# Altium PCB Bicycle_Project.PcbDoc (part 1 of 2)
Units mil, origin at the board's own origin, x right, y up, seen from the top; angles counter-clockwise.
Board outline 2480.32 x 3188.98 mil, 2 copper layers (Top Layer, Bottom Layer), stack 35.085 mil thick; 108 components, 96 nets, 359 pads, 129 vias.
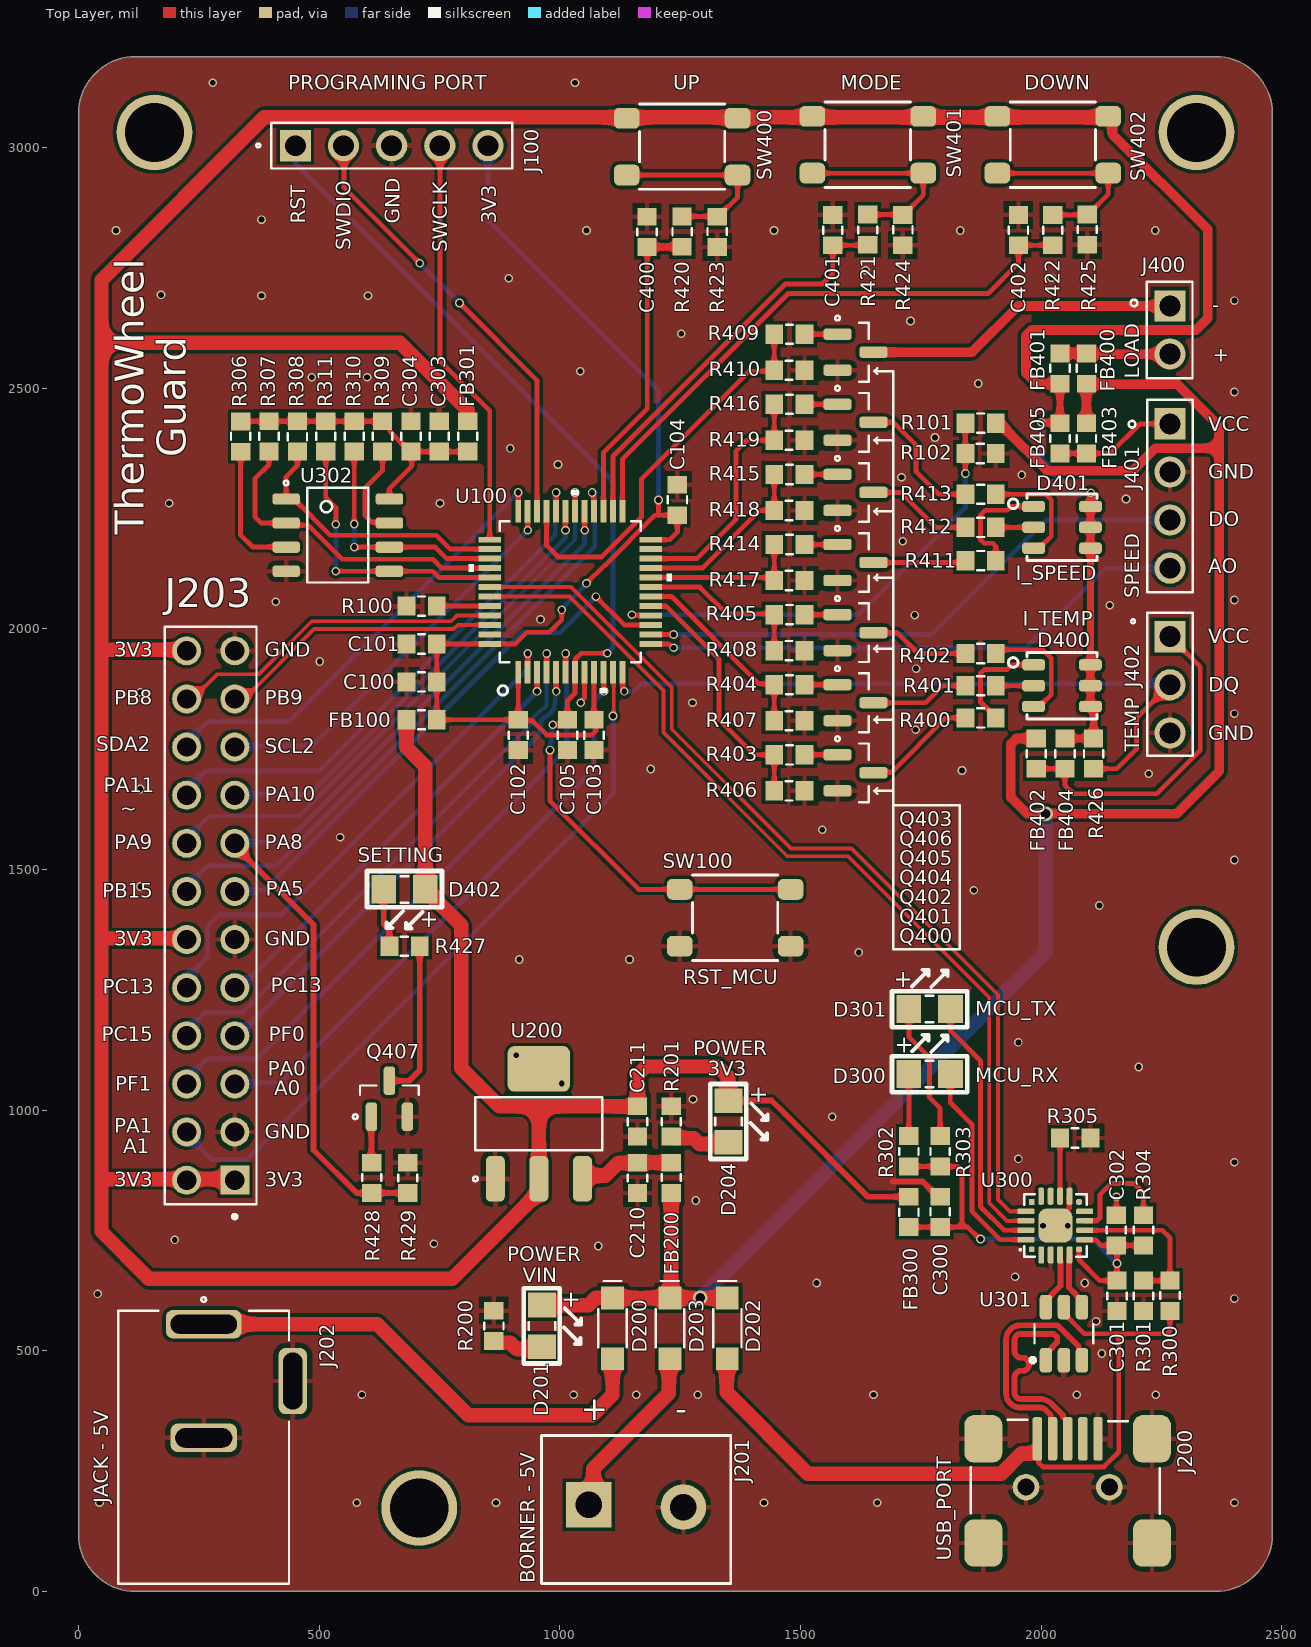
[diagram p0: Top Layer view]
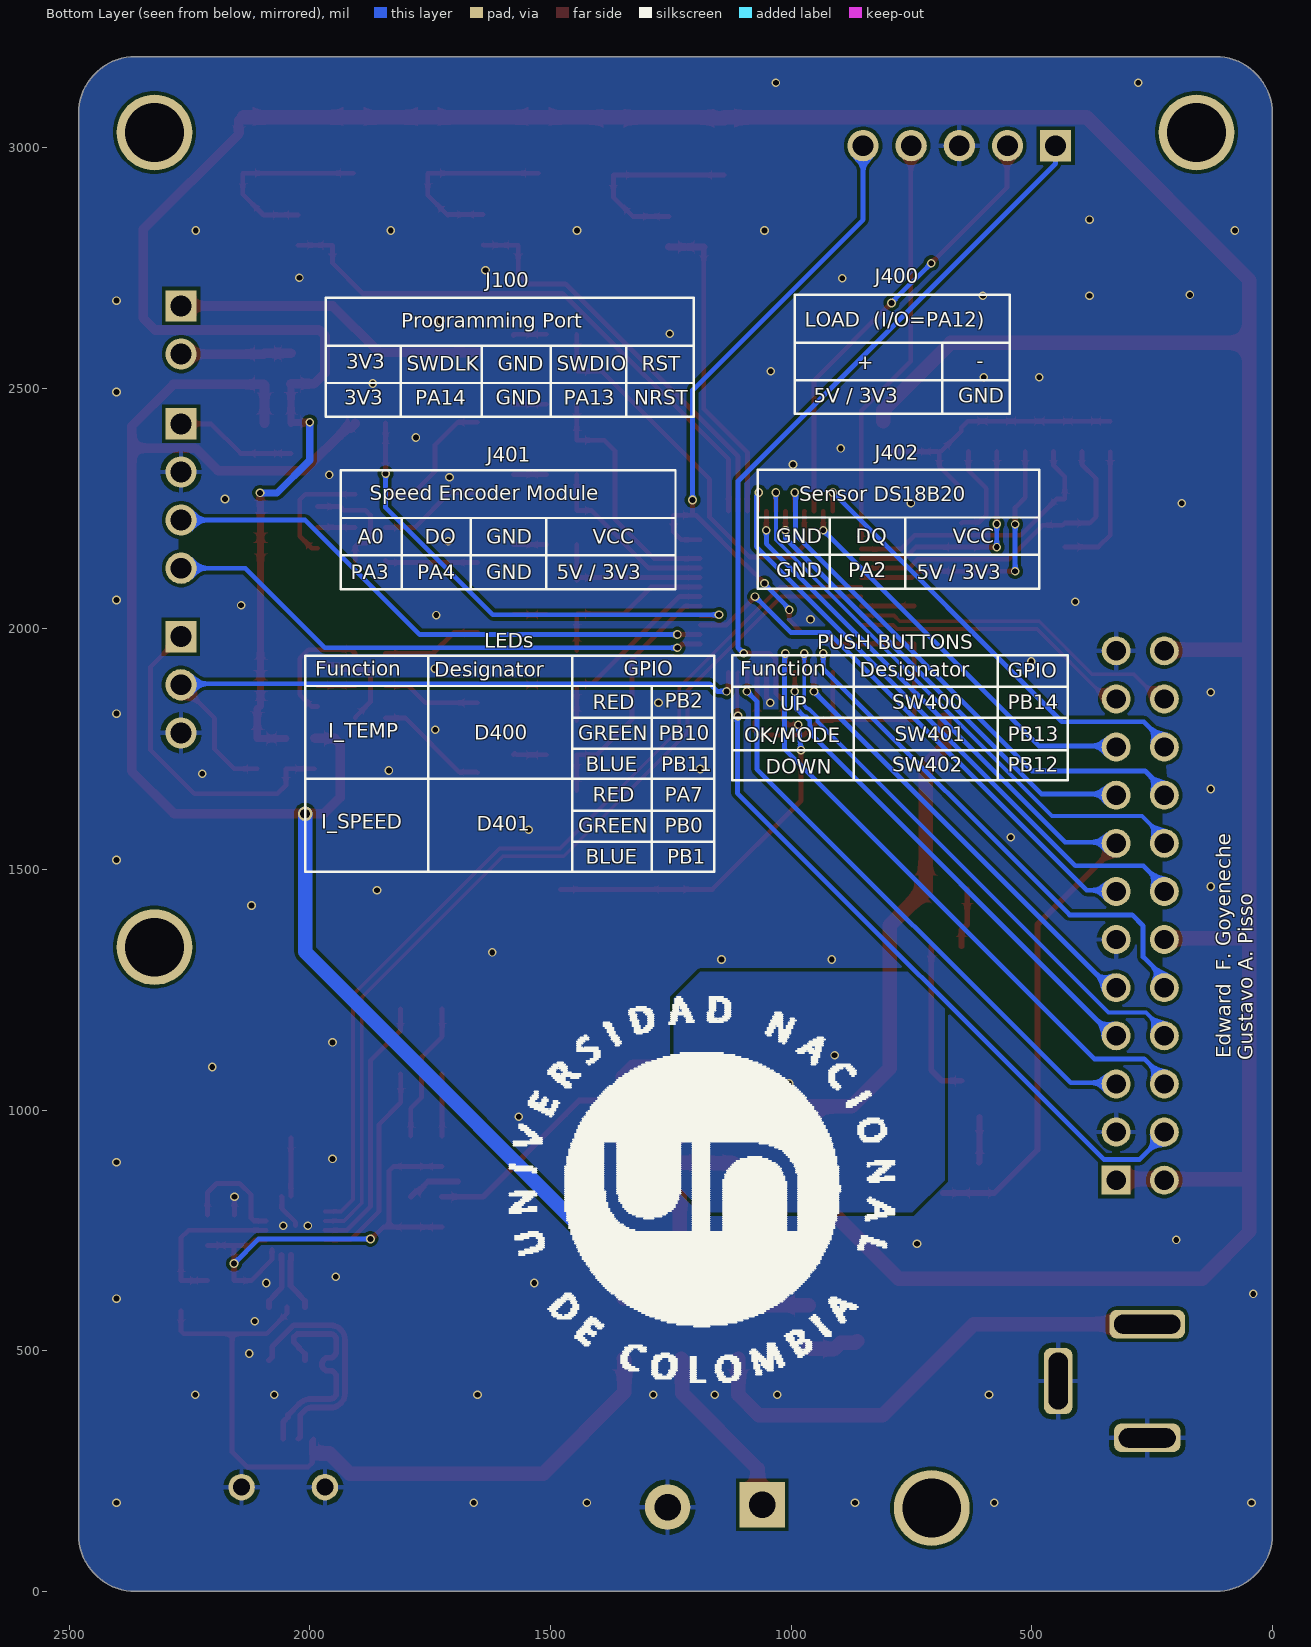
[diagram p1: Bottom Layer view, seen from below]
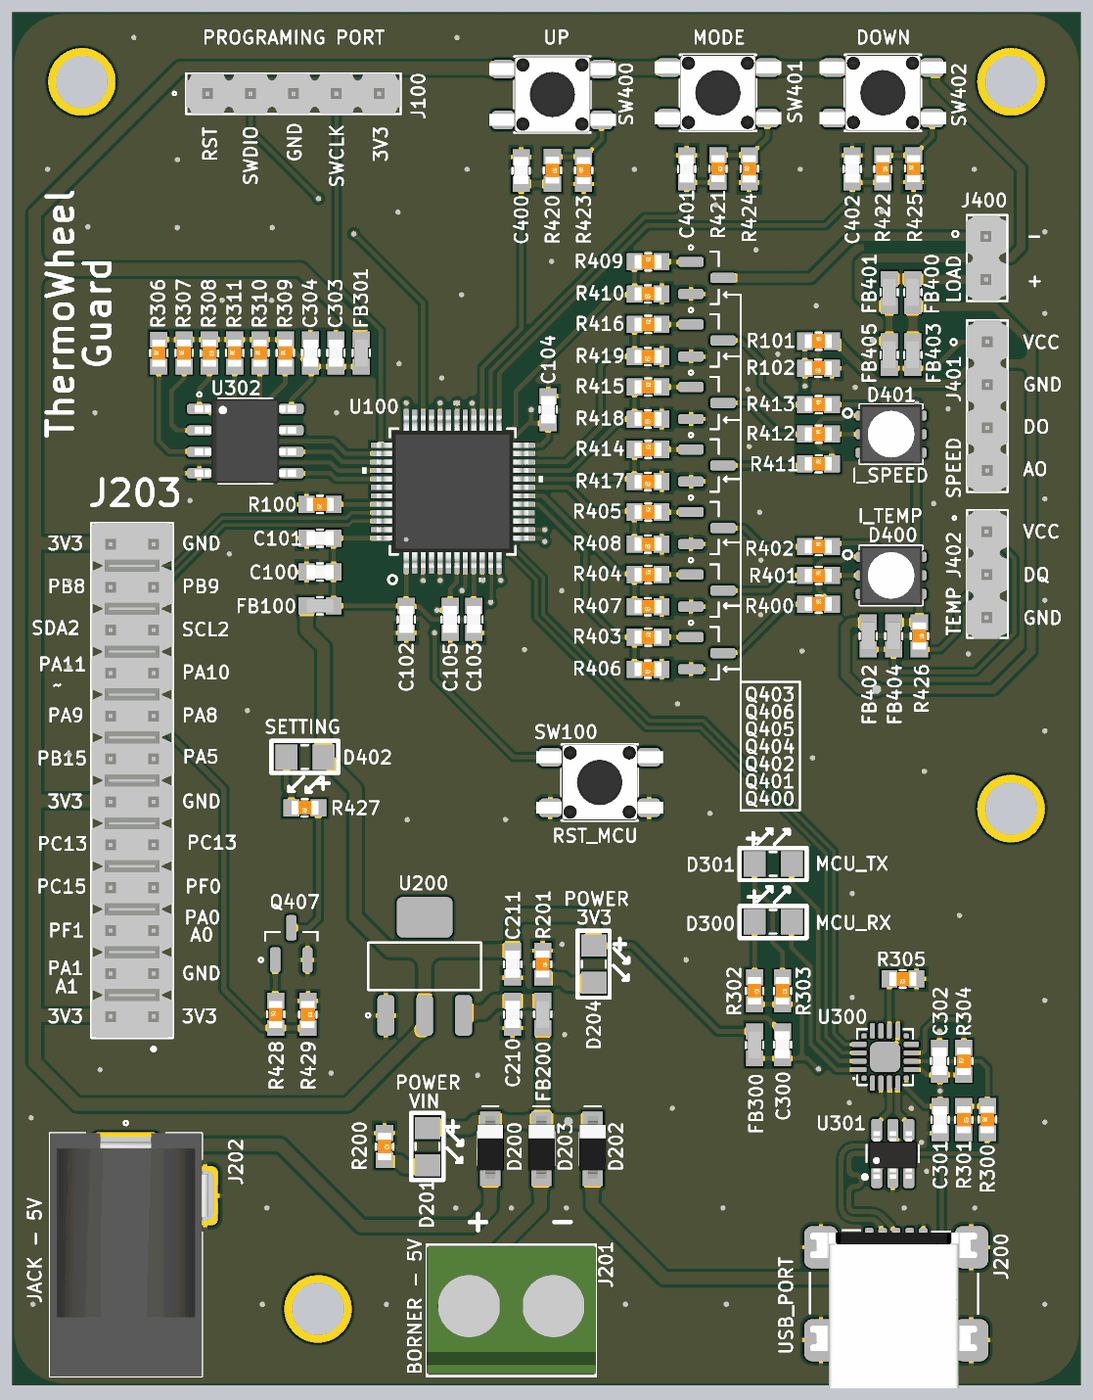
[diagram p3: 3D render of the assembled board from above, using the file's embedded part models]

## Layer stack, top to bottom
Top Solder: solder mask 0.4, Solder Resist, Dk 3.5
Top Layer: signal copper 1.4
Dielectric 1: dielectric 32.285, FR-4, Dk 4.8
Bottom Layer: signal copper 1.4
Bottom Solder: solder mask 0.4, Solder Resist, Dk 3.5

## Board outline
0,118.11 0,3070.87 cw(c118.11,3070.87) 118.11,3188.98 2362.2,3188.98 cw(c2362.2,3070.87) 2480.32,3070.87 2480.32,118.11 cw(c2362.2,118.11) 2362.2,0 118.11,0 cw(c118.11,118.11)

## Design rules (kind name [scope] priority, off if disabled: settings)
Clearance Clearance_D_P [(InNet('D_N') OR InNet('D_P') OR InNet('USB_D_N') OR InNet('USB_D_P'))] p1: gap=6 ignorepadtopadclearanceinfootprint=FALSE
Clearance [All] p2: gap=7 ignorepadtopadclearanceinfootprint=FALSE
DiffPairsRouting [All] p1: maxlimit=6 minlimit=6 mostfreqgap=6 toplayer_minwidth=12 toplayer_maxwidth=12 toplayer_prefwidth=12 bottomlayer_minwidth=12 bottomlayer_maxwidth=12 bottomlayer_prefwidth=12 maxuncoupledlength=500
HoleSize [All] p1: absolutevalues=TRUE maxlimit=1000 minlimit=12 maxpercent=80.000 minpercent=20.000
HoleToHoleClearance [All] p1: gap=12 allowstackedmicrovias=TRUE
MatchedLengths USB_L [InDifferentialPairClass('All Differential Pairs')] p1: tolerance=25 checknetsindiffpair=TRUE checkdiffpairvsdiffpair=FALSE checkxsignals=FALSE checkothers=FALSE
MinimumSolderMaskSliver [All] p1: minsoldermaskwidth=1
NetAntennae [All] p1 off: netantennaetolerance=0
PolygonConnect PolygonConnect_GND [IsVia] p1: connectstyle=Direct reliefconductorwidth=10 reliefentries=4 polygonreliefangle="90 Angle" airgapwidth=10
PolygonConnect [All] p2: connectstyle=Relief reliefconductorwidth=10 reliefentries=4 polygonreliefangle="90 Angle" airgapwidth=10
RoomDefinition Power [InComponentClass('Power')] p1: confinementstyle=ConfineIn formatcopy=TRUE lockcomponents=FALSE outline -1000,-1000 5615,-1000 5615,3730 -1000,3730
RoomDefinition MCU [InComponentClass('MCU')] p2: confinementstyle=ConfineIn formatcopy=TRUE lockcomponents=FALSE outline -1000,-1000 5785,-1000 5785,3635 -1000,3635
RoomDefinition IN_OUT [InComponentClass('IN_OUT')] p3: confinementstyle=ConfineIn formatcopy=TRUE lockcomponents=FALSE outline -1000,-1000 6480,-1000 6480,3255.91 -1000,3255.91
RoomDefinition Communication [InComponentClass('Communication')] p4: confinementstyle=ConfineIn formatcopy=TRUE lockcomponents=FALSE outline -1000,-1000 6120,-1000 6120,3450 -1000,3450
RoutingVias [All] p1: holewidth=12 width=18 viastyle="Through Hole" minholewidth=12 minwidth=18 maxholewidth=44 maxwidth=50
SilkToSilkClearance [All] p1: silktosilkclearance=1
SilkToSolderMaskClearance [IsPad] p1: minsilkscreentomaskgap=0.1 clearancetoexposedcopper=TRUE
SolderMaskExpansion [All] p1: expansion=4 istentingtop=FALSE
Width [All] p1: maxlimit=200 minlimit=8 preferedwidth=10
23 further rules are at their usual default settings.

## Classes and differential pairs
component class Power: C210 C211 D200 D201 D202 D203 D204 FB200 J200 J201 J202 J203 R200 R201 U200
component class MCU: C100 C101 C102 C103 C104 C105 FB100 J100 R100 R101 R102 SW100 U100
component class IN_OUT: C400 C401 C402 D400 D401 D402 FB400 FB401 FB402 FB403 FB404 FB405 J400 J401 J402 Q400 Q401 Q402 Q403 Q404 Q405 Q406 Q407 R400 R401 R402 R403 R404 R405 R406 R407 R408 R409 R410 R411 R412 R413 R414 R415 R416 R417 R418 R419 R420 R421 R422 R423 R424 R425 R426 R427 R428 R429 SW400 SW401 SW402
component class Communication: C300 C301 C302 C303 C304 D300 D301 FB300 FB301 R300 R301 R302 R303 R304 R305 R306 R307 R308 R309 R310 R311 U300 U301 U302
differential pair D: +D_P -D_N
differential pair USB_D: +USB_D_P -USB_D_N

## Components (designator, comment, footprint, x,y, rotation, side; value= is the part's Value field where it differs from the comment)
C100 "22uF 6V3" 0603_cap 712.6,1889.76 r180 top value=22uF
C101 "0.1uF 50V" 0603_cap 712.6,1968.5 r180 top value=0.1uF
C102 "0.1uF 50V" 0603_cap 913.39,1779.52 r270 top value=0.1uF
C103 "0.1uF 50V" 0603_cap 1070.87,1779.52 r270 top value=0.1uF
C104 "0.1uF 50V" 0603_cap 1244.09,2267.72 r90 top value=0.1uF
C105 "10uF 10V" 0603_cap 1015.75,1779.52 r270 top value=10uF
C210 "10uF 10V" 0603_cap 1161.3,859.25 r270 top value=10uF (schematic designator C200)
C211 "22uF 6V3" 0603_cap 1161.3,976.38 r270 top value=22uF (schematic designator C201)
C300 "10uF 10V" 0603_cap 1790.08,788.38 r90 top value=10uF
C301 "0.1uF 50V" 0603_cap 2157.48,614.17 r270 top value=0.1uF
C302 "0.1uF 50V" 0603_cap 2156.2,750.16 r90 top value=0.1uF
C303 "10uF 10V" 0603_cap 749.45,2399.8 r90 top value=10uF
C304 "0.1uF 50V" 0603_cap 690.47,2399.8 r90 top value=0.1uF
C400 "1uF 50V" 0603_cap 1181.1,2824.8 r270 top value=1uF
C401 "1uF 50V" 0603_cap 1566.93,2828.74 r270 top value=1uF
C402 "1uF 50V" 0603_cap 1952.76,2828.74 r270 top value=1uF
D200 "40V 1A" SOD_123 1109.31,546.5 r270 top
D201 "2V" 0805_LED 962.8,551.65 r270 top
D202 "40V 1A" SOD_123 1347.8,546.5 r270 top
D203 "40V 1A" SOD_123 1228.55,546.5 r270 top
D204 "2V" 0805_LED 1350.39,976.38 r270 top
D300 "2V" 0805_LED 1768.39,1075 r0 top
D301 "2.9V" 0805_LED 1768.39,1210 r0 top
D400 "SPEED" RGB_NS_3.5X3.7 2043.31,1881.89 r0 top
D401 "TEMPERATURE" RGB_NS_3.5X3.7 2043.31,2210.91 r0 top
D402 "2V" 0805_LED 677.17,1458.66 r180 top
FB100 "60OHM 2A" 0603_fb 712.6,1811.02 r180 top value="60 OHM"
FB200 "60OHM 2A" 0603_fb 1231.3,859.25 r90 top value="60 OHM"
FB300 "60OHM 2A" 0603_fb 1725.08,788.38 r270 top value="60 OHM"
FB301 "60OHM 2A" 0603_fb 808.42,2399.8 r90 top value="60 OHM"
FB400 "60OHM 2A" 0603_fb 2094.02,2540.91 r90 top value="60 OHM"
FB401 "60OHM 2A" 0603_fb 2039.02,2540.91 r90 top value="60 OHM"
FB402 "60OHM 2A" 0603_fb 1989.96,1740.91 r270 top value="60 OHM"
FB403 "60OHM 2A" 0603_fb 2094.02,2395.91 r270 top value="60 OHM"
FB404 "60OHM 2A" 0603_fb 2049.49,1740.91 r270 top value="60 OHM"
FB405 "60OHM 2A" 0603_fb 2039.02,2395.91 r270 top value="60 OHM"
J100 "JTAG" CON_5X1_TH_2.54MM 650.39,3003.94 r0 top
J200 "USB Mini B" CON_5x1_SMD_miniUSB_B 2055.12,208.66 r0 top
J201 "VIN_5V" CON_2x1_TH_5MM 1158.21,170 r0 top
J202 "PWR JACK 2.1mm" CON_POWER_BARREL_2.1MM_3CONN 259.84,437.01 r0 top
J203 "10129381-924001BLF" CON_2x12_th_2.54MM 324.41,854.33 r90 top
J400 "LOAD" CON_2X1_TH_2.54MM 2267,2621 r270 top
J401 "SPEED" CON_4X1_TH_2.54MM 2267.59,2276 r270 top
J402 "TEMP" CON_3X1_TH_2.54MM 2267.72,1883.77 r270 top
Q400 "N CH" SOT_23_3 1614.17,1700.79 r0 top
Q401 "N CH" SOT_23_3 1614.17,1846.46 r0 top
Q402 "N CH" SOT_23_3 1614.17,1992.13 r0 top
Q403 "N CH" SOT_23_3 1614.17,2574.8 r0 top
Q404 "N CH" SOT_23_3 1614.17,2137.8 r0 top
Q405 "N CH" SOT_23_3 1614.17,2283.46 r0 top
Q406 "N CH" SOT_23_3 1614.17,2429.13 r0 top
Q407 "N CH" SOT_23_3 645.67,1023.62 r90 top
R100 "10k 1/10W" 0603_res 712.6,2047.24 r180 top value=10k
R101 "5k1 1/10W" 0603_res 1874.02,2427.41 r0 top value=5k1
R102 "10k 1/10W" 0603_res 1874.02,2364.41 r180 top value=10k
R200 "220R 1/10W" 0603_res 862.8,551.65 r270 top value=220R
R201 "100R 1/10W" 0603_res 1231.3,976.38 r270 top value=100R
R300 "5k1 1/10W" 0603_res 2267.72,614.17 r90 top value=5k1
R301 "10k 1/10W" 0603_res 2212.6,614.17 r270 top value=10k
R302 "100R 1/10W" 0603_res 1725.08,914.38 r270 top value=100R
R303 "33R 1/10W" 0603_res 1790.08,914.38 r270 top value=33R
R304 "10k 1/10W" 0603_res 2212.6,750.16 r90 top value=10k
R305 "3k3 1/10W" 0603_res 2070.87,941.93 r180 top value=3k3
R306 "10k 1/10W" 0603_res 336.61,2399.61 r90 top value=10k
R307 "10k 1/10W" 0603_res 395.59,2399.8 r90 top value=10k
R308 "10k 1/10W" 0603_res 454.57,2399.8 r270 top value=10k
R309 "10k 1/10W" 0603_res 631.5,2399.8 r90 top value=10k
R310 "10k 1/10W" 0603_res 572.52,2399.8 r90 top value=10k
R311 "10k 1/10W" 0603_res 513.54,2399.8 r90 top value=10k
R400 "52R3 1/10W" 0603_res 1874.02,1814.96 r0 top value=52R3
R401 "24R 1/10W" 0603_res 1874.01,1881.89 r0 top value=24R
R402 "30 1/10W" 0603_res 1874.02,1948.82 r0 top value=30R
R403 "1k 1/10W" 0603_res 1476.89,1738.19 r0 top value=1k
R404 "1k 1/10W" 0603_res 1476.89,1883.86 r0 top value=1k
R405 "1k 1/10W" 0603_res 1476.89,2029.53 r0 top value=1k
R406 "10k 1/10W" 0603_res 1476.89,1663.39 r180 top value=10k
R407 "10k 1/10W" 0603_res 1476.89,1809.06 r180 top value=10k
R408 "10k 1/10W" 0603_res 1476.89,1954.72 r180 top value=10k
R409 "1k 1/10W" 0603_res 1476.89,2612.2 r0 top value=1k
R410 "10k 1/10W" 0603_res 1476.89,2537.4 r180 top value=10k
R411 "52R3 1/10W" 0603_res 1874.02,2141.73 r0 top value=52R3
R412 "24R 1/10W" 0603_res 1874.02,2210.91 r0 top value=24R
R413 "30 1/10W" 0603_res 1874.02,2279.53 r0 top value=30R
R414 "1k 1/10W" 0603_res 1476.89,2175.39 r0 top value=1k
R415 "1k 1/10W" 0603_res 1476.89,2320.77 r0 top value=1k
R416 "1k 1/10W" 0603_res 1476.89,2466.54 r0 top value=1k
R417 "10k 1/10W" 0603_res 1476.89,2100.39 r180 top value=10k
R418 "10k 1/10W" 0603_res 1476.89,2245.96 r180 top value=10k
R419 "10k 1/10W" 0603_res 1476.89,2391.73 r180 top value=10k
R420 "1k 1/10W" 0603_res 1253.94,2825.51 r270 top value=1k
R421 "1k 1/10W" 0603_res 1639.76,2829.45 r270 top value=1k
R422 "1k 1/10W" 0603_res 2024.25,2828.74 r270 top value=1k
R423 "10k 1/10W" 0603_res 1326.77,2824.8 r90 top value=10k
R424 "10k 1/10W" 0603_res 1712.6,2828.74 r90 top value=10k
R425 "10k 1/10W" 0603_res 2095.75,2829.45 r90 top value=10k
R426 "4k7 1/10W" 0603_res 2109.02,1740.91 r270 top value=4k7
R427 "100R 1/10W" 0603_res 677.17,1340.55 r180 top value=100R
R428 "1k 1/10W" 0603_res 609.19,859.25 r90 top value=1k
R429 "10k 1/10W" 0603_res 684,859.25 r270 top value=10k
SW100 "RST_MCU" Sw_PUSH_4.5x4.5x5mm 1364.17,1399.61 r0 top
SW400 "UP" Sw_PUSH_4.5x4.5x5mm 1253.94,3001.97 r180 top
SW401 "MODE" Sw_PUSH_4.5x4.5x5mm 1639.76,3005.91 r180 top
SW402 "DOWN" Sw_PUSH_4.5x4.5x5mm 2024.25,3005.91 r180 top
U100 "STM32F030C8T6TR" LQFP48_7x7mm 1021.54,2077.05 r90 top locked
U200 "AMS1117-3.3" SOT_223 956.3,971.38 r90 top
U300 "CP2102N-A02-GQFN20R" WFQFN_20_EP_3X3MM 2029.45,760 r90 top
U301 "USBLC6-2SC6" SOT_23_6 2047.24,535.43 r90 top
U302 "ZD25WQ16BTIGR" SOIC_8_3.9mm 538.43,2194.8 r0 top

## Footprints (in the part's own frame and the unit in brackets; to place one, negate y for a bottom-side part, rotate by r counter-clockwise, add the part's x,y. Pads: shape width x height; smd on the part's side, far side on the other; paste and mask are expansions set on the pad)
0603_cap [mil]
  rect 37x40 smd: 1(-31.5,0) 2(31.5,0)
  silkscreen extent -7,-20 8,20, body extent -31,-17 31,17, height 34
0603_fb [mil]
  rect 37x40 smd: 1(-31.5,0) 2(31.5,0)
  silkscreen extent -7,-20 8,20, body extent -32,-16 31,16, height 32
0603_res [mil] "1608 Metric / 20190225 / C-A.Serna.A"
  rect 37x40 smd: 1(-31.5,0) 2(31.5,0)
  silkscreen extent -7,-20 8,20, body extent -31,-16 32,16, height 12
0805_LED [mm]
  rect 1.3x1.5 smd: 1(-1.1,0) 2(1.1,0)
  silkscreen extent -1.98,-0.97 1.98,2.07, body extent -1,-0.62 1,0.63, height 1.1
CON_2X1_TH_2.54MM [mm]
  rect 1.65x1.65 / inner round 1.65 / far side rect 1.65x1.65 hole 1.1: 1(-1.27,0.015)
  round 1.65 hole 1.1: 2(1.27,0.015)
  silkscreen extent -2.54,-2.06 2.54,1.2, body extent -2.54,-1.27 2.54,1.14, height 8.18
CON_2x1_TH_5MM [mm]
  rect 2.4x2.4 hole 1.4: 1(-2.5,0.254)
  round 2.4 hole 1.4: 2(2.5,0.127)
  silkscreen extent -5,-3.9 5,3.9, body extent -5,-3.75 5,3.75, height 11.5
CON_2x12_th_2.54MM [mm]
  rect 1.53x1.53 hole 1.02: 01(0,0)
  round 1.53 hole 1.02: 02(0,2.54) 03(2.54,0) 04(2.54,2.54) 05(5.08,0) 06(5.08,2.54) 07(7.62,0) 08(7.62,2.54) 09(10.16,0) 10(10.16,2.54) 11(12.7,0) 12(12.7,2.54) 13(15.24,0) 14(15.24,2.54) 15(17.78,0) 16(17.78,2.54) 17(20.32,0) 18(20.32,2.54) 19(22.86,0) 20(22.86,2.54) 21(25.4,0) 22(25.4,2.54) 23(27.94,0) 24(27.94,2.54)
  silkscreen extent -2.02,-1.14 29.21,3.68, body extent -1.27,-1.14 29.21,3.68, height 8.18
CON_3X1_TH_2.54MM [mm]
  rect 1.65x1.65 / inner round 1.65 / far side rect 1.65x1.65 hole 1.1: 1(-2.54,0)
  round 1.65 hole 1.1: 2(0,0) 3(2.54,0)
  silkscreen extent -3.81,-2.05 3.75,1.2, body extent -3.81,-1.25 3.81,1.16, height 8.18
CON_4X1_TH_2.54MM [mm]
  rect 1.65x1.65 / inner round 1.65 / far side rect 1.65x1.65 hole 1.1: 1(-3.81,0)
  round 1.65 hole 1.1: 2(-1.27,0) 3(1.27,0) 4(3.81,0)
  silkscreen extent -5.08,-2.17 5.08,1.2, body extent -5.08,-1.2 5.08,1.2, height 8.18
CON_5x1_SMD_miniUSB_B [mm] "20190328 / V-A.Patino"
  rrect50% 2x2.5 smd: 0(-4.45,-2.75) 0(-4.45,2.75) 0(4.45,-2.75) 0(4.45,2.75)
  round 1.4 hole 0.889: 0(-2.2,0.2) 0(2.2,0.2)
  rrect50% 0.5x2.3 smd: 1(-1.6,2.75) 2(-0.8,2.75) 3(0,2.75) 4(0.8,2.75) 5(1.6,2.75)
  silkscreen extent -5.11,-1.2 4.85,3.76, body extent -5.1,-5.6 4.8,3.65, height 4
CON_5X1_TH_2.54MM [mm]
  rect 1.65x1.65 / inner round 1.65 / far side rect 1.65x1.65 hole 1.1: 1(-5.08,0)
  round 1.65 hole 1.1: 2(-2.54,0) 3(0,0) 4(2.54,0) 5(5.08,0)
  silkscreen extent -7.14,-1.2 6.36,1.2, body extent -6.35,-1.2 6.35,1.2, height 8.18
CON_POWER_BARREL_2.1MM_3CONN [mm]
  rrect50% 4x1.5 hole 1.016 slot 3.5 at 0 deg: 1(0,3)
  rrect50% 3.5x1.5 hole 1.016 slot 3 at 0 deg: 2(0,-3)
  rrect50% 1.5x3.5 hole 1.016 slot 3 at 90 deg: 3(4.7,0)
  silkscreen extent -4.5,-10.7 4.5,4.42, body extent -4.5,-10.7 4.9,3.7, height 11
LQFP48_7x7mm [mil]
  rect 47x12 smd paste+0 mask+1.8: 1(-167.32,108.27) 2(-167.32,88.58) 3(-167.32,68.9) 4(-167.32,49.21) 5(-167.32,29.53) 6(-167.32,9.84) 7(-167.32,-9.84) 8(-167.32,-29.53) 9(-167.32,-49.21) 10(-167.32,-68.9) 11(-167.32,-88.58) 12(-167.32,-108.27) 25(167.32,-108.27) 26(167.32,-88.58) 27(167.32,-68.9) 28(167.32,-49.21) 29(167.32,-29.53) 30(167.32,-9.84) 31(167.32,9.84) 32(167.32,29.53) 33(167.32,49.21) 34(167.32,68.9) 35(167.32,88.58) 36(167.32,108.27)
  rect 12x47 smd paste+0 mask+1.8: 13(-108.27,-167.32) 14(-88.58,-167.32) 15(-68.9,-167.32) 16(-49.21,-167.32) 17(-29.53,-167.32) 18(-9.84,-167.32) 19(9.84,-167.32) 20(29.53,-167.32) 21(49.21,-167.32) 22(68.9,-167.32) 23(88.58,-167.32) 24(108.27,-167.32) 37(108.27,167.32) 38(88.58,167.32) 39(68.9,167.32) 40(49.21,167.32) 41(29.53,167.32) 42(9.84,167.32) 43(-9.84,167.32) 44(-29.53,167.32) 45(-49.21,167.32) 46(-68.9,167.32) 47(-88.58,167.32) 48(-108.27,167.32)
  silkscreen extent -215,-211 211,211, body extent -177,-177 177,177, height 63
RGB_NS_3.5X3.7 [mm] "20220901/V-A.Patino"
  rrect50% 1.2x0.6 smd: 1(-1.5,1.1) 2(-1.5,0) 3(-1.5,-1.1) 4(1.5,-1.1) 5(1.5,0) 6(1.5,1.1)
  silkscreen extent -2.83,-1.75 1.85,1.75, body extent -1.85,-1.75 1.85,1.75, height 2.8
SOD_123 [mm] "/ 20191030 / V-A.Patino"
  rect 1.2x1.2 smd: 1(-1.6,0) 2(1.6,0)
  silkscreen extent -2.5,-0.75 1,0.75, body extent -1.93,-0.8 1.77,0.8, height 1.28
SOIC_8_3.9mm [mm]
  rrect50% 1.45x0.6 smd: 1(-2.725,1.905) 2(-2.725,0.635) 3(-2.725,-0.635) 4(-2.725,-1.905) 5(2.725,-1.905) 6(2.725,-0.635) 7(2.725,0.635) 8(2.725,1.905)
  silkscreen extent -2.85,-2.5 1.6,2.88, body extent -3.01,-2.5 3.01,2.5, height 1.73
SOT_23_3 [mm] "TO-236-3, SC-59/ 20220901 / V-A.Patino"
  rrect50% 1.5x0.6 smd: 1(-0.95,0.95) 2(-0.95,-0.95) 3(0.95,0)
  silkscreen extent -1.07,-1.55 0.7,1.92, body extent -0.7,-1.52 0.7,1.53, height 1.12
SOT_23_6 [mm] "/ 20190225 / V-A.Patino"
  rrect50% 1.3x0.65 smd: 1(-1.4,0.95) 2(-1.4,0) 3(-1.4,-0.95) 4(1.4,-0.95) 5(1.4,0) 6(1.4,0.95)
  silkscreen extent -1.52,-1.55 0.5,1.78, body extent -1.5,-1.45 1.3,1.45, height 1.45
SOT_223 [mm] "TO-261-4, TO-261AA / 20220901/ V-A.Patino"
  rrect50% 2.4x1 smd: 1(-2.9,2.3) 2(-2.9,0) 3(-2.9,-2.3)
  rrect30% 2.4x3.3 smd: 4(2.9,0)
  silkscreen extent -3.02,-3.35 1.4,3.47, body extent -1.86,-3.35 1.86,3.35, height 1.8
Sw_PUSH_4.5x4.5x5mm [mm]
  rrect50% 1.35x1.1 smd: 1(-2.925,1.5) 1(2.925,1.5) 2(-2.925,-1.5) 2(2.925,-1.5)
  silkscreen extent -2.25,-2.25 2.25,2.25, body extent -3.75,-2.25 3.75,2.25, height 3.8
WFQFN_20_EP_3X3MM [mm] "QFN_20/ 20210809/ V-A.Patino"
  rrect50% 0.3x0.3 smd: 1(-1.25,1.25) 6(-1.25,-1.25) 11(1.25,-1.25)
  rrect50% 0.9x0.3 smd: 2(-1.55,0.75) 3(-1.55,0.25) 4(-1.55,-0.25) 5(-1.55,-0.75) 12(1.55,-0.75) 13(1.55,-0.25) 14(1.55,0.25) 15(1.55,0.75)
  rrect50% 0.3x0.9 smd: 7(-0.75,-1.55) 8(-0.25,-1.55) 9(0.25,-1.55) 10(0.75,-1.55) 17(0.75,1.55) 18(0.25,1.55) 19(-0.25,1.55) 20(-0.75,1.55)
  rect 0.3x0.3 smd: 16(1.25,1.25)
  rrect50% 1.8x1.8 smd: 21(0,0)
  silkscreen extent -1.65,-1.65 1.65,1.9, body extent -1.5,-1.5 1.5,1.5, height 0.8

## Part data
C100 C211: library part Cap_22uF_0805_6V3, "6.3V 22uF X5R ±20% 0805 Multilayer Ceramic Capacitors MLCC - SMD/SMT ROHS", Manufacturer="Samsung Electro-Mechanics", Manufacturer Part Number=CL21A226MQQNNNE, Supplier Part Number 1=C5674, ComponentLink1Description=LCSC, ComponentLink1URL=https://www.lcsc.com/product-detail/Multilayer-Ceramic-Capacitors-MLCC-SMD-SMT_Samsung-Electro-Mechanics-CL21A226MQQNNNE_C5674.html, Supplier 1=LCSC
C101 C102 C103 C104 C301 C302 C304: library part Cap_0.1uF_0603_50V, "50V 100nF Y5V -20%~+80% 0603 Multilayer Ceramic Capacitors MLCC - SMD/SMT ROHS", Manufacturer="Walsin Tech Corp", Manufacturer Part Number=0603F104Z500CT, Supplier Part Number 1=C83060, ComponentLink1Description=LCSC, ComponentLink1URL=https://www.lcsc.com/product-detail/Multilayer-Ceramic-Capacitors-MLCC-SMD-SMT_Walsin-Tech-Corp-0603F104Z500CT_C83060.html, Supplier 1=LCSC
C105 C210 C300 C303: library part Cap_10uF_0603_10V, "10V 10uF X5R ±10% 0603 Multilayer Ceramic Capacitors MLCC - SMD/SMT ROHS", Manufacturer=CCTC, Manufacturer Part Number=TCC0603X5R106K100CT, Supplier Part Number 1=C380314, ComponentLink1Description=LCSC, ComponentLink1URL=https://www.lcsc.com/product-detail/Multilayer-Ceramic-Capacitors-MLCC-SMD-SMT_CCTC-TCC0603X5R106K100CT_C380314.html, Supplier 1=LCSC
C400 C401 C402: library part Cap_1uF_0603_50V, "50V 1uF X5R ±10% 0603 Multilayer Ceramic Capacitors MLCC - SMD/SMT ROHS", Manufacturer="Samsung Electro-Mechanics", Manufacturer Part Number=CL10A105KB8NNNC, Supplier Part Number 1=C15849, ComponentLink1Description=LCSC, ComponentLink1URL=https://www.lcsc.com/product-detail/Multilayer-Ceramic-Capacitors-MLCC-SMD-SMT_Samsung-Electro-Mechanics-CL10A105KB8NNNC_C15849.html, Supplier 1=LCSC
D200 D202 D203: library part D_Schottky_40V_1A_SOD_123F, "DIODE SCHOTTKY 40V 1A SOD123F", Manufacturer="Shanghai Prisemi Elec", Manufacturer Part Number=PSBD1DF40V1H, Supplier Part Number 1=C110730, ComponentLink1Description=LCSC, ComponentLink1URL=https://www.lcsc.com/product-detail/Switching-Diode_Shanghai-Prisemi-Elec-PSBD1DF40V1H_C110730.html, Supplier 1=LCSC
D201 D204 D300 D402: library part LED_0805_RED, "LED RED CLEAR 0805 SMD", Manufacturer=XINGLIGHT, Manufacturer Part Number=XL-2012SURC, Supplier Part Number 1=C965812, ComponentLink1Description=LCSC, ComponentLink1URL=https://www.lcsc.com/product-detail/Light-Emitting-Diodes-LED_XINGLIGHT-XL-2012SURC_C965812.html, Supplier 1=LCSC
D301: library part LED_0805_Green, "LED GREEN CLEAR 0805 SMD", Manufacturer=XINGLIGHT, Manufacturer Part Number=XL-2012UGC, Supplier Part Number 1=C965815, ComponentLink1Description=LCSC, ComponentLink1URL=https://www.lcsc.com/product-detail/Light-Emitting-Diodes-LED_XINGLIGHT-XL-2012UGC_C965815.html, Supplier 1=LCSC
D400 D401: library part LED_RGB_3535_SMD, "-30℃~+85℃ RGB 110° 3535(mm) Light Emitting Diodes (LED) ROHS", Manufacturer="Foshan NationStar Optoelectronics", Manufacturer Part Number=RS-3535MWAM, Supplier Part Number 1=C842778, ComponentLink1Description=LCSC, ComponentLink1URL=https://www.lcsc.com/product-detail/Light-Emitting-Diodes-LED_Foshan-NationStar-Optoelectronics-RS-3535MWAM_C842778.html, Supplier 1=LCSC
FB100 FB200 FB300 FB301 FB400 FB401 FB402 FB403 FB404 FB405: library part FB_60_0603_2A, "2A 1 100mΩ 60Ω@100MHz ±25% 0603 Ferrite Beads ROHS", Manufacturer=TAI-TECH, Manufacturer Part Number=HCB1608KF-600T20, Supplier Part Number 1=C369516, ComponentLink1Description=LCSC, ComponentLink1URL=https://www.lcsc.com/product-detail/Ferrite-Beads_TAI-TECH-HCB1608KF-600T20_C369516.html, Supplier 1=LCSC
  FB400 FB402 FB403: Usage=NM
J100: library part Con_5X1_TH_2.54mm, "CONN HEADER VERT 5POS 2.54MM", Manufacturer="Amphenol ICC (FCI)", Manufacturer Part Number=10129378-905001BLF, Supplier Part Number 1=10129378-905001BLF-ND, ComponentLink1Description=Digi-Key, ComponentLink1URL=https://www.digikey.com/en/products/detail/amphenol-cs-fci/10129378-905001BLF/7915937?s=N4IgTCBcDaIIwAY5gJwGYDsAOAtChArAkgEIAyAYiALoC%2BQA, Supplier 1=Digi-Key
J200: library part Con_Mini_USB_B, "CONN RCPT USB2.0 MINI B SMD R/A", Manufacturer="EDAC Inc.", Manufacturer Part Number=KH-MINI-SMT-5P-Cu, Supplier Part Number 1=C2688795, ComponentLink1Description=LCSC, ComponentLink1URL=https://datasheet.lcsc.com/lcsc/2106070035_Shenzhen-Kinghelm-Elec-KH-MINI-SMT-5P-Cu_C2688795.pdf, Supplier 1=LCSC
J201: library part Con_2x1_TH_5mm, "2POS 5MM", Manufacturer=JILN, Manufacturer Part Number=JL126-50002G01, Supplier Part Number 1=C394556, ComponentLink1Description=Digi-Key, ComponentLink1URL=https://www.lcsc.com/product-detail/Screw-terminal_JILN-JL126-50002G01_C394556.html, Supplier 1=LCSC
J202: library part Con_Power_Jack_2.1mm_3pins, "CONN PWR JACK 2X5.5MM SOLDER", Manufacturer=HCTL, Manufacturer Part Number=HC-DC-005-2.0T, Supplier Part Number 1=C3010533, ComponentLink1Description=LCSC, ComponentLink1URL=https://www.lcsc.com/product-detail/AC-DC-Power-Connectors_HCTL-HC-DC-005-2-0T_C3010533.html, Supplier 1=LCSC
J203: library part Con_2x12_TH_2.54mm, "CONN HEADER VERT 24POS 2.54MM", Manufacturer="Amphenol ICC (FCI)", Supplier Part Number 1=10129381-924001BLF-ND, ComponentLink1Description=Digi-Key, Manufacturer Part Number=10129381-924001BLF, Supplier 1=Digi-Key
J400: library part Con_2x1_TH_2.54mm, "CONN HEADER VERT 2POS 2.54MM", Manufacturer="Amphenol ICC (FCI)", Manufacturer Part Number=10129378-902001BLF, Supplier Part Number 1=10129378-902001BLF-ND, ComponentLink1Description=Digi-Key, ComponentLink1URL=https://www.digikey.com/en/products/detail/amphenol-cs-fci/10129378-902001BLF/7915924?s=N4IgTCBcDaIIwAY5gJwGYDsAOAtChYCSAQgDIBiIAugL5A, Supplier 1=Digi-Key
J401: library part Con_4X1_TH_2.54mm, "CONN HEADER VERT 4POS 2.54MM", Manufacturer="Amphenol ICC (FCI)", Manufacturer Part Number=10129378-904001BLF, Supplier Part Number 1=10129378-904001BLF-ND, ComponentLink1Description=Digi-Key, ComponentLink1URL=https://www.digikey.com/en/products/detail/amphenol-cs-fci/10129378-904001BLF/7915932?s=N4IgTCBcDaIIwAY5gJwGYDsAOAtChALAkgEIAyAYiALoC%2BQA, Supplier 1=Digi-Key
J402: library part Con_3X1_TH_2.54mm, "CONN HEADER VERT 3POS 2.54MM", Manufacturer="Amphenol ICC (FCI)", Manufacturer Part Number=10129378-903001BLF, Supplier Part Number 1=10129378-903001BLF-ND, ComponentLink1Description=Digi-Key, ComponentLink1URL=https://www.digikey.com/en/products/detail/amphenol-cs-fci/10129378-903001BLF/7915928, Supplier 1=Digi-Key
Q400 Q401 Q402 Q403 Q404 Q405 Q406 Q407: library part Q_NFET_20V_3.2A_SOT23, "MOSFET N-CH 20V SOT23", Manufacturer=Doeshare, Manufacturer Part Number=DN2302S, Supplier Part Number 1=C2931750, ComponentLink1Description=LCSC, ComponentLink1URL=https://www.lcsc.com/product-detail/MOSFETs_Doeshare-DN2302S_C2931750.html, Supplier 1=LCSC
R100 R102 R301 R304 R306 R307 R308 R309 R310 R311 R406 R407 R408 R410 R417 R418 R419 R423 R424 R425 R429: library part Res_10k_0603_1/10W, "RES SMD 10k OHM 5% 1/10W 0603", Manufacturer=FOJAN, Manufacturer Part Number=FRC0603J103TS, Supplier Part Number 1=C2930027, ComponentLink1Description=LCSC, ComponentLink1URL=https://www.lcsc.com/product-detail/Chip-Resistor-Surface-Mount_FOJAN-FRC0603J103TS_C2930027.html, Supplier 1=LCSC
R101 R300: library part Res_5k1_0603_1/10W, "RES SMD 5k1 OHM 5% 1/10W 0603", Manufacturer=FOJAN, Manufacturer Part Number="FRC0603J512 TS", Supplier Part Number 1=C2907114, ComponentLink1Description=LCSC, ComponentLink1URL=https://www.lcsc.com/product-detail/Chip-Resistor-Surface-Mount_FOJAN-FRC0603J512-TS_C2907114.html, Supplier 1=LCSC
R200: library part Res_220R_0603_1/10W, "RES SMD 220R OHM 5% 1/10W 0603", Manufacturer=FOJAN, Manufacturer Part Number="FRC0603J221 TS", Supplier Part Number 1=C2907127, ComponentLink1Description=LCSC, ComponentLink1URL=https://www.lcsc.com/product-detail/Chip-Resistor-Surface-Mount_FOJAN-FRC0603J221-TS_C2907127.html, Supplier 1=LCSC
R201 R302 R427: library part Res_100R_0603_1/10W, "RES SMD 100R OHM 5% 1/10W 0603", Manufacturer=FOJAN, Manufacturer Part Number="FRC0603J101 TS", Supplier Part Number 1=C2907089, ComponentLink1Description=LCSC, ComponentLink1URL=https://www.lcsc.com/product-detail/Chip-Resistor-Surface-Mount_FOJAN-FRC0603J101-TS_C2907089.html, Supplier 1=LCSC
R303: library part Res_33R_0603_1/10W, "RES SMD 33R OHM 5% 1/10W 0603", Manufacturer=FOJAN, Manufacturer Part Number="FRC0603J330 TS", Supplier Part Number 1=C2907154, ComponentLink1Description=LCSC, ComponentLink1URL=https://www.lcsc.com/product-detail/Chip-Resistor-Surface-Mount_FOJAN-FRC0603J330-TS_C2907154.html, Supplier 1=LCSC
R305: library part Res_3k3_0603_1/10W, "RES SMD 3k3 OHM 5% 1/10W 0603", Manufacturer=FOJAN, Manufacturer Part Number="FRC0603J332 TS", Supplier Part Number 1=C2907140, ComponentLink1Description=LCSC, ComponentLink1URL=https://www.lcsc.com/product-detail/Chip-Resistor-Surface-Mount_FOJAN-FRC0603J332-TS_C2907140.html, Supplier 1=LCSC, Usage=NM
R400 R411: library part Res_52R3_0603_1/10W_1, "RES SMD 52R3 OHM 1% 1/10W 0603", Manufacturer=FOJAN, Manufacturer Part Number=FRC0603F52R3TS, Supplier Part Number 1=C2998074, ComponentLink1Description=LCSC, ComponentLink1URL=https://www.lcsc.com/product-detail/Chip-Resistor-Surface-Mount_FOJAN-FRC0603F52R3TS_C2998074.html, Supplier 1=LCSC
R401 R412: library part Res_24R_0603_1/10W, "RES SMD 24R OHM 5% 1/10W 0603", Manufacturer=FOJAN, Manufacturer Part Number="FRC0603J240 TS", Supplier Part Number 1=C2907132, ComponentLink1Description=LCSC, ComponentLink1URL=https://www.lcsc.com/product-detail/Chip-Resistor-Surface-Mount_FOJAN-FRC0603J240-TS_C2907132.html, Supplier 1=LCSC
R402 R413: library part Res_30R_0603_1/10W, "RES SMD 30R OHM 1% 1/10W 0603", Manufacturer=FOJAN, Manufacturer Part Number=FRC0603F30R0TS, Supplier Part Number 1=C2907026, ComponentLink1Description=LCSC, ComponentLink1URL=https://www.lcsc.com/product-detail/Chip-Resistor-Surface-Mount_FOJAN-FRC0603F30R0TS_C2907026.html, Supplier 1=LCSC
R403 R404 R405 R409 R414 R415 R416 R420 R421 R422 R428: library part Res_1k_0603_1/10W, "RES SMD 1k OHM 5% 1/10W 0603", Manufacturer=FOJAN, Manufacturer Part Number="FRC0603J102 TS", Supplier Part Number 1=C2907113, ComponentLink1Description=LCSC, ComponentLink1URL=https://www.lcsc.com/product-detail/Chip-Resistor-Surface-Mount_FOJAN-FRC0603J102-TS_C2907113.html, Supplier 1=LCSC
R426: library part Res_4k7_0603_1/10W, "RES SMD 4k7 OHM 5% 1/10W 0603", Manufacturer=FOJAN, Manufacturer Part Number="FRC0603J472 TS", Supplier Part Number 1=C2907166, ComponentLink1Description=LCSC, ComponentLink1URL=https://www.lcsc.com/product-detail/Chip-Resistor-Surface-Mount_FOJAN-FRC0603J472-TS_C2907166.html, Supplier 1=LCSC
SW100 SW400 SW401 SW402: library part Sw_PUSH_4.5x4.5x5.0xmm, "SWITCH TACTILE SPST-NO 0.05A 12V", Manufacturer=BZCN, Manufacturer Part Number=TSC015A05026A, Supplier Part Number 1=C2888509, ComponentLink1Description=LCSC, ComponentLink1URL=https://www.lcsc.com/product-detail/Tactile-Switches_BZCN-TSC015A05026A_C2888509.html, Last modified by=N-A.Potosi, Last modified date=20190222, Supplier 1=LCSC
U100: library part IC_STM32F030C8T6TR_LQFP48_7x7MM, "IC MCU 32BIT 64KB FLASH 48LQFP", Manufacturer=STMicroelectronics, Supplier Part Number 1=C23922, ComponentLink1Description=LCSC, ComponentLink1URL=https://www.lcsc.com/product-detail/ST-Microelectronics_STMicroelectronics-STM32F030C8T6_C23922.html, Manufacturer Part Number=STM32F030C8T6TR, Supplier 1=LCSC
U200: library part LDO_3V3_1A_FIXED, "1A 60dB@(120Hz) Fixed 3.3V Positive 18V SOT-223 Linear Voltage Regulators (LDO) ROHS", Manufacturer="UMW(Youtai Semiconductor Co., Ltd.)", Supplier Part Number 1=C347222, ComponentLink1Description=LCSC, ComponentLink1URL=https://www.lcsc.com/product-detail/_UMW-Youtai-Semiconductor-Co-Ltd-_C347222.html, Manufacturer Part Number=AMS1117-3.3, Supplier 1=LCSC
U300: library part IC_SGL_USB2UART-BRIDGE_20QFN, "IC USB TO UART BRIDGE QFN20", Manufacturer="Silicon Labs", Supplier Part Number 1=C969913, ComponentLink1Description=LCSC, ComponentLink1URL=https://www.lcsc.com/product-detail/USB-ICs_SILICON-LABS-CP2102N-A02-GQFN20R_C969913.html, Manufacturer Part Number=CP2102N-A02-GQFN20R, Supplier 1=LCSC
U301: library part TVS_5.25V_2CH_SOT_23_6, "TVS DIODE 5.25V 17V SOT23-6", Manufacturer=STMicroelectronics, Supplier Part Number 1=C7519, ComponentLink1Description=LCSC, ComponentLink1URL=https://www.lcsc.com/product-detail/ESD-Protection-Devices_STMicroelectronics-USBLC6-2SC6_C7519.html, Manufacturer Part Number=USBLC6-2SC6, Supplier 1=LCSC
U302: library part IC_FLASH_ZD25WQ16BTIGR_8SOP, "IC FLASH 16M SPI 85MHZ 8SOP", Manufacturer=Zetta, Supplier Part Number 1=C2896790, ComponentLink1Description=LCSC, ComponentLink1URL=https://www.lcsc.com/product-detail/NOR-FLASH_Zetta-ZD25WQ16BTIGR_C2896790.html, Manufacturer Part Number=ZD25WQ16BTIGR, Supplier 1=LCSC

## Free pads (board coordinates)
  round 157.48 hole 122.05: 0(157.48,3031.5) 0(707.68,173.23) 0(2322.83,1338.58) 0(2322.83,3031.5)

## Via types
v1: diameter 18, hole 12, Top Layer to Bottom Layer, tented both sides, 127 vias
v2: diameter 30, hole 20, Top Layer to Bottom Layer, tented both sides, 2 vias

## Nets (pads, with @x,y where several pads share a name; then routed paths per layer and width w, separated by ;. In a path a pad name is that pad's centre, name@x,y a point inside that pad or via, vN(x,y) a via of type N, cw(c..) or ccw(c..) an arc to the next point about the centre after c; other vN are vias at no path point)
3V3: C211.1 D204.1 D400.4 D400.5 D400.6 D401.4 D401.5 D401.6 D402.1 FB100.2 FB300.1 FB301.2 FB401.1 FB404.1 FB405.1 J203.01 J203.02 J203.12 J203.24 R426.1 SW400.2 SW401.2 SW402.2 U200.2 | length 10772.2
  Top Layer w12: D204.1@1350.39,1019.68 1439.96,1019.68 1468.5,991.14 1639.77,819.88 FB300.1@1725.08,819.88
  Top Layer w15: v1(2000,2429.13) 2000.57,2428.56 2037.86,2428.56 FB405.1@2039.02,2427.41 FB401.1@2039.02,2509.41 ; FB404.1@2049.49,1772.41 R426.1@2109.02,1772.41 2109.02,1834.27 2104.7,1838.58 D400.4@2102.36,1838.58 D400.5@2102.36,1881.89 D400.6@2102.36,1925.2 D401.4@2102.36,2167.6 D401.5@2102.36,2210.91 D401.6@2102.36,2254.21 2102.85,2254.7 2102.85,2281.99 v1(2103.35,2282.48)
  Top Layer w20: FB401.1@2039.02,2509.41 1990.59,2509.41 1968.5,2531.5 1968.5,2609.28 1980.22,2621 2321.79,2621 2346.46,2645.67 2346.46,2829.72 2147.47,3028.71 2147.47,3056.9 SW402.2@2139.41,3064.96
  Top Layer w30: J203.12@216.54,1356.69 49.05,1356.69 47.47,1358.27 ; J203.24@216.54,1956.69 51.41,1956.69 47.47,1952.76 ; J203.01@316.54,856.69 216.54,856.69 49.83,856.69 47.47,854.33 ; FB100.2@681.1,1811.02 681.1,1753.94 720.47,1714.57 720.47,1454.72 731.06,1444.13 735,1444.13 795.28,1383.86 795.28,1086.61 874.01,1007.88 956.3,1007.88 ; FB301.2@808.42,2431.3 808.42,2453.8 667.74,2594.49 47.47,2594.49 ; SW400.2@1138.78,3061.02 SW400.2@1158.46,3061.02 ; SW400.2@1138.78,3062.99 385.83,3062.99 47.47,2724.64 47.47,2594.49 ; SW400.2@1158.46,3062.99 1369.09,3062.99 1524.61,3062.99 1754.92,3062.99 1909.09,3062.99 SW402.2@2137.44,3062.99 ; D204.1@1350.39,1019.68 1349.41,1020.67 1349.41,1068.9 1327.76,1090.55 1178.87,1090.55 1161.3,1072.98 C211.1@1161.3,1007.88 956.3,1007.88 ; 47.47,854.33 47.47,1358.27 ; 47.47,854.33 47.47,747.8 145.67,649.61 776.26,649.61 956.3,829.65 U200.2@956.3,857.2 956.3,1007.88 ; 47.47,1358.27 47.47,1952.76 ; 47.47,1952.76 47.47,2594.49
  Bottom Layer w15: v1(2000,2429.13) 2000,2350.39 2067.91,2282.48 v1(2103.35,2282.48)
"3V3 _MCU": C100.1 C101.1 C102.1 C103.1 C104.1 FB100.1 J100.5 U100.1 U100.9 U100.24 U100.48 | length 2357.8
  Top Layer w8: 1093.24,2132.61 1093.87,2132.61
  Top Layer w10: U100.1@913.27,1909.72 913.27,1811.14 C102.1@913.39,1811.02 ; v1(1003.94,2039.37) 1003.94,2018.7 978.35,1993.11 931.1,1993.11 906.77,1968.78 U100.48@854.21,1968.78 744.37,1968.78 C101.1@744.1,1968.5 C100.1@744.1,1889.76 FB100.1@744.1,1811.02 C102.1@913.39,1811.02 ; v1(1055.12,2094.49) 1093.24,2132.61 ; U100.9@1070.75,1909.72 1070.75,1811.14 C103.1@1070.87,1811.02 1074.8,1807.09 1074.8,1787.4 1066.93,1779.52 972.44,1779.52 942.53,1809.44 914.97,1809.44 C102.1@913.39,1811.02 ; 1093.87,2132.61 1197.49,2236.22 1204.72,2236.22 ; U100.24@1188.86,2185.32 1228.62,2185.32 1244.09,2200.79 C104.1@1244.09,2236.22 ; v1(1204.72,2267.72) 1204.72,2236.22 ; C104.1@1236.22,2236.22 1204.72,2236.22
  Bottom Layer w10: J100.5@850.39,3005.54 J100.5@850.39,3003.94 850.39,2850.39 1204.72,2496.06 v1(1204.72,2267.72) ; v1(1003.94,2039.37) 1003.94,2041.34 1055.12,2092.52 v1(1055.12,2094.49)
3V3_CP21: C300.1 C301.1 C302.1 FB300.2 R302.2 R303.2 R304.1 U300.6 U300.7 | length 1013.6
  Top Layer w10: FB300.2@1725.08,756.88 C300.1@1790.08,756.88 1835.5,756.88 ; R302.2@1725.08,882.88 R303.2@1790.08,882.88 1825.78,882.88 1835.5,873.16 1835.5,756.88 ; v1(1874.02,732.28) 1871.85,732.28 1847.26,756.88 1835.5,756.88 ; U300.6@2078.66,710.79 2078.66,689.06 2122.04,645.67 C301.1@2157.48,645.67 v1(2157.48,681.1) 2157.48,717.38 C302.1@2156.2,718.66 ; U300.7@2090.47,730.47 2090.59,730.36 2113.46,730.36 2125.16,718.66 C302.1@2156.2,718.66 ; R304.1@2212.6,718.66 C302.1@2156.2,718.66
  Bottom Layer w10: v1(1874.02,732.28) 2106.3,732.28 v1(2157.48,681.1)
3V3_FLASH: C303.1 C304.1 FB301.1 R306.2 R307.2 R308.1 R309.2 R310.2 R311.2 U302.8 | length 614.9
  Top Layer w10: R306.2@336.61,2431.11 336.81,2431.3 R307.2@395.59,2431.3 R308.1@454.57,2431.3 R311.2@513.54,2431.3 R310.2@572.52,2431.3 R309.2@631.5,2431.3 633,2431.3 646.5,2417.8 646.5,2410.78 688.97,2368.3 C304.1@690.47,2368.3 691.93,2366.85 691.93,2337.6 645.71,2291.38 U302.8@645.71,2269.8 ; C304.1@695.93,2368.3 C303.1@749.45,2368.3 FB301.1@808.42,2368.3
B_SPEED_LED: R405.1 R408.2 U100.19 | length 355.1
  Top Layer w10: U100.19@1188.86,2086.89 1291.06,2086.89 1346.46,2031.5 1443.43,2031.5 R405.1@1445.39,2029.53 R408.2@1445.39,1954.72
B_TEMP_LED: R416.1 R419.2 U100.22 | length 516.7
  Top Layer w10: U100.22@1188.86,2145.94 1284.72,2145.94 1366.14,2227.36 1366.14,2370.08 1387.8,2391.73 R419.2@1445.39,2391.73 R416.1@1445.39,2466.54
D_N: U300.5 U301.4 | length 119.8
  Top Layer w12: U300.5@2058.98,698.98 2058.98,687.35 2058.13,686.51 2058.13,631.26 2072.03,617.36 2072.03,616.18 2084.65,603.56 U301.4@2084.65,590.55
D_P: U300.4 U301.6 | length 121.3
  Top Layer w12: U301.6@2009.84,590.55 2009.84,603.56 2022.44,616.16 2022.44,617.36 2040.13,635.06 2040.13,686.51 2039.29,687.35 U300.4@2039.29,698.98
EP: U200.4
  other v1: 1003.94,1055.12 909.45,1114.17
FLASH_CS: R308.2 U100.38 U302.1 | length 574.4
  Top Layer w10: R308.2@454.57,2368.3 454.57,2339.41 431.14,2315.98 U302.1@431.14,2269.8 447.87,2269.8 523.06,2194.61 743.38,2194.61 772.36,2165.63 U100.38@854.21,2165.63
FLASH_MISO: R307.1 U100.40 U302.2 | length 679.6
  Top Layer w10: R307.1@395.59,2368.3 395.59,2341.46 366.14,2312.01 366.14,2233.27 379.61,2219.8 U302.2@431.14,2219.8 435.68,2215.27 476.66,2215.27 547.32,2144.61 736.29,2144.61 754.65,2126.26 U100.40@854.21,2126.26
FLASH_MOSI: R311.1 U100.41 U302.5 | length 582.4
  Top Layer w10: R311.1@513.54,2368.3 513.54,2272.87 534.45,2251.97 v1(534.45,2217.52) ; v1(534.45,2119.8) U302.5@645.71,2119.8 735.65,2119.8 748.87,2106.57 U100.41@854.21,2106.57
  Bottom Layer w10: v1(534.45,2119.8) v1(534.45,2217.52)
FLASH_SCK: R310.1 U100.39 U302.6 | length 490.1
  Top Layer w10: v1(572.52,2169.8) U302.6@645.71,2169.8 740.86,2169.8 764.72,2145.94 U100.39@854.21,2145.94 ; v1(572.52,2217.99) R310.1@572.52,2368.3
  Bottom Layer w10: v1(572.52,2169.8) v1(572.52,2217.99)
G_SPEED_LED: R404.1 R407.2 U100.18 | length 407.3
  Top Layer w10: U100.18@1188.86,2067.2 1232.01,2067.2 1413.39,1885.83 1443.43,1885.83 R404.1@1445.39,1883.86 R407.2@1445.39,1809.06
G_TEMP_LED: R415.1 R418.2 U100.21 | length 380.9
  Top Layer w10: U100.21@1188.86,2126.26 1295.55,2126.26 1415.26,2245.96 R418.2@1445.39,2245.96 R415.1@1445.39,2320.77